# Altium PCB Priz.PcbDoc
Units mm, origin at the board's own origin, x right, y up, seen from the top; angles counter-clockwise.
Board outline 50.24 x 50.24 mm, 2 copper layers (Top Layer, Bottom Layer); 25 components, 41 nets, 106 pads, 20 vias.
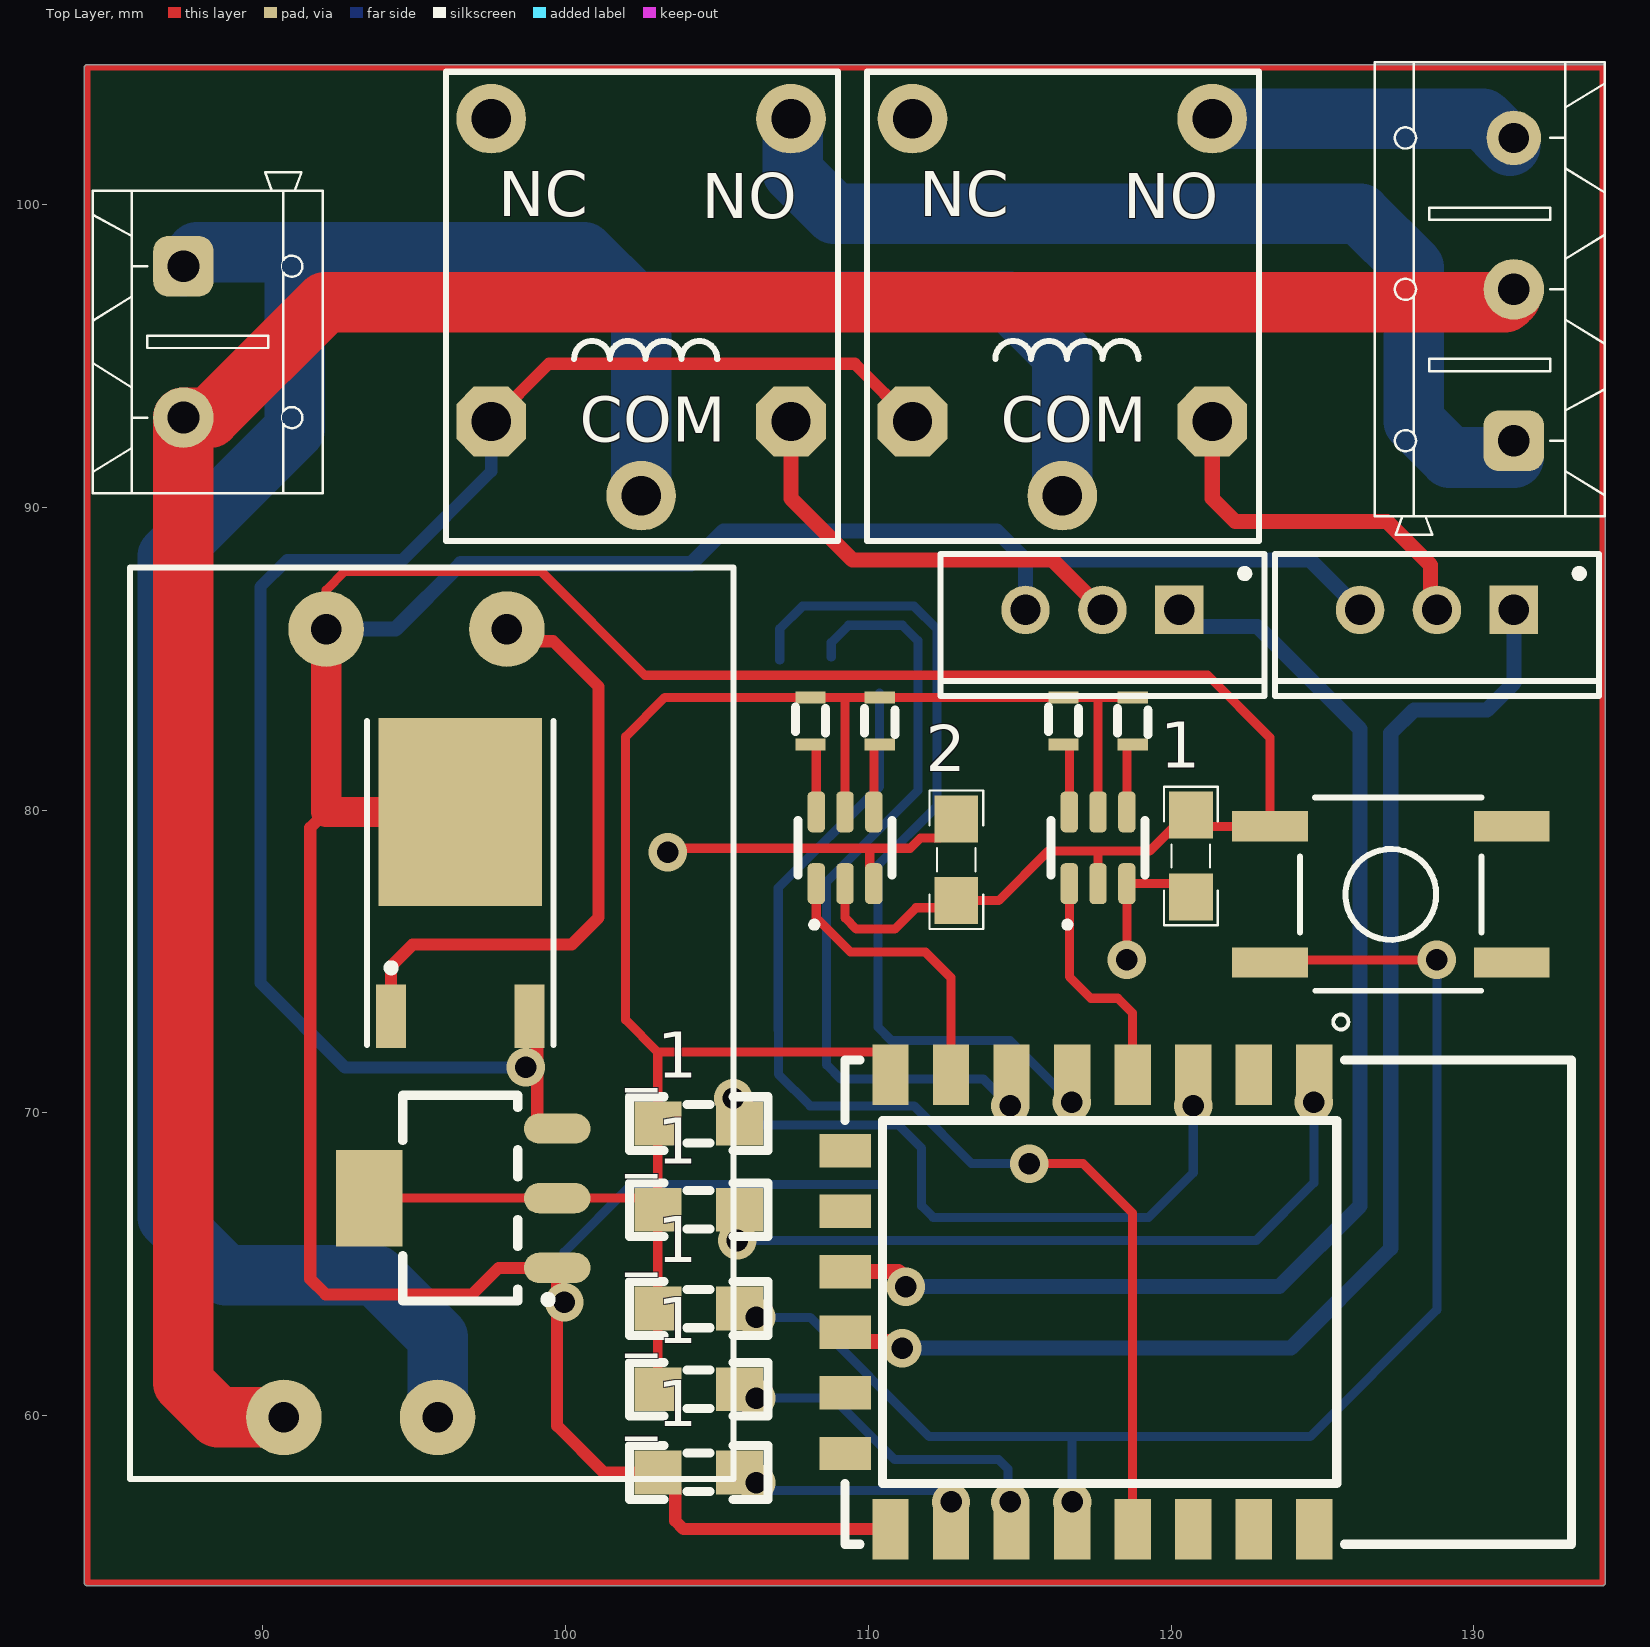
[diagram p0: Top Layer view]
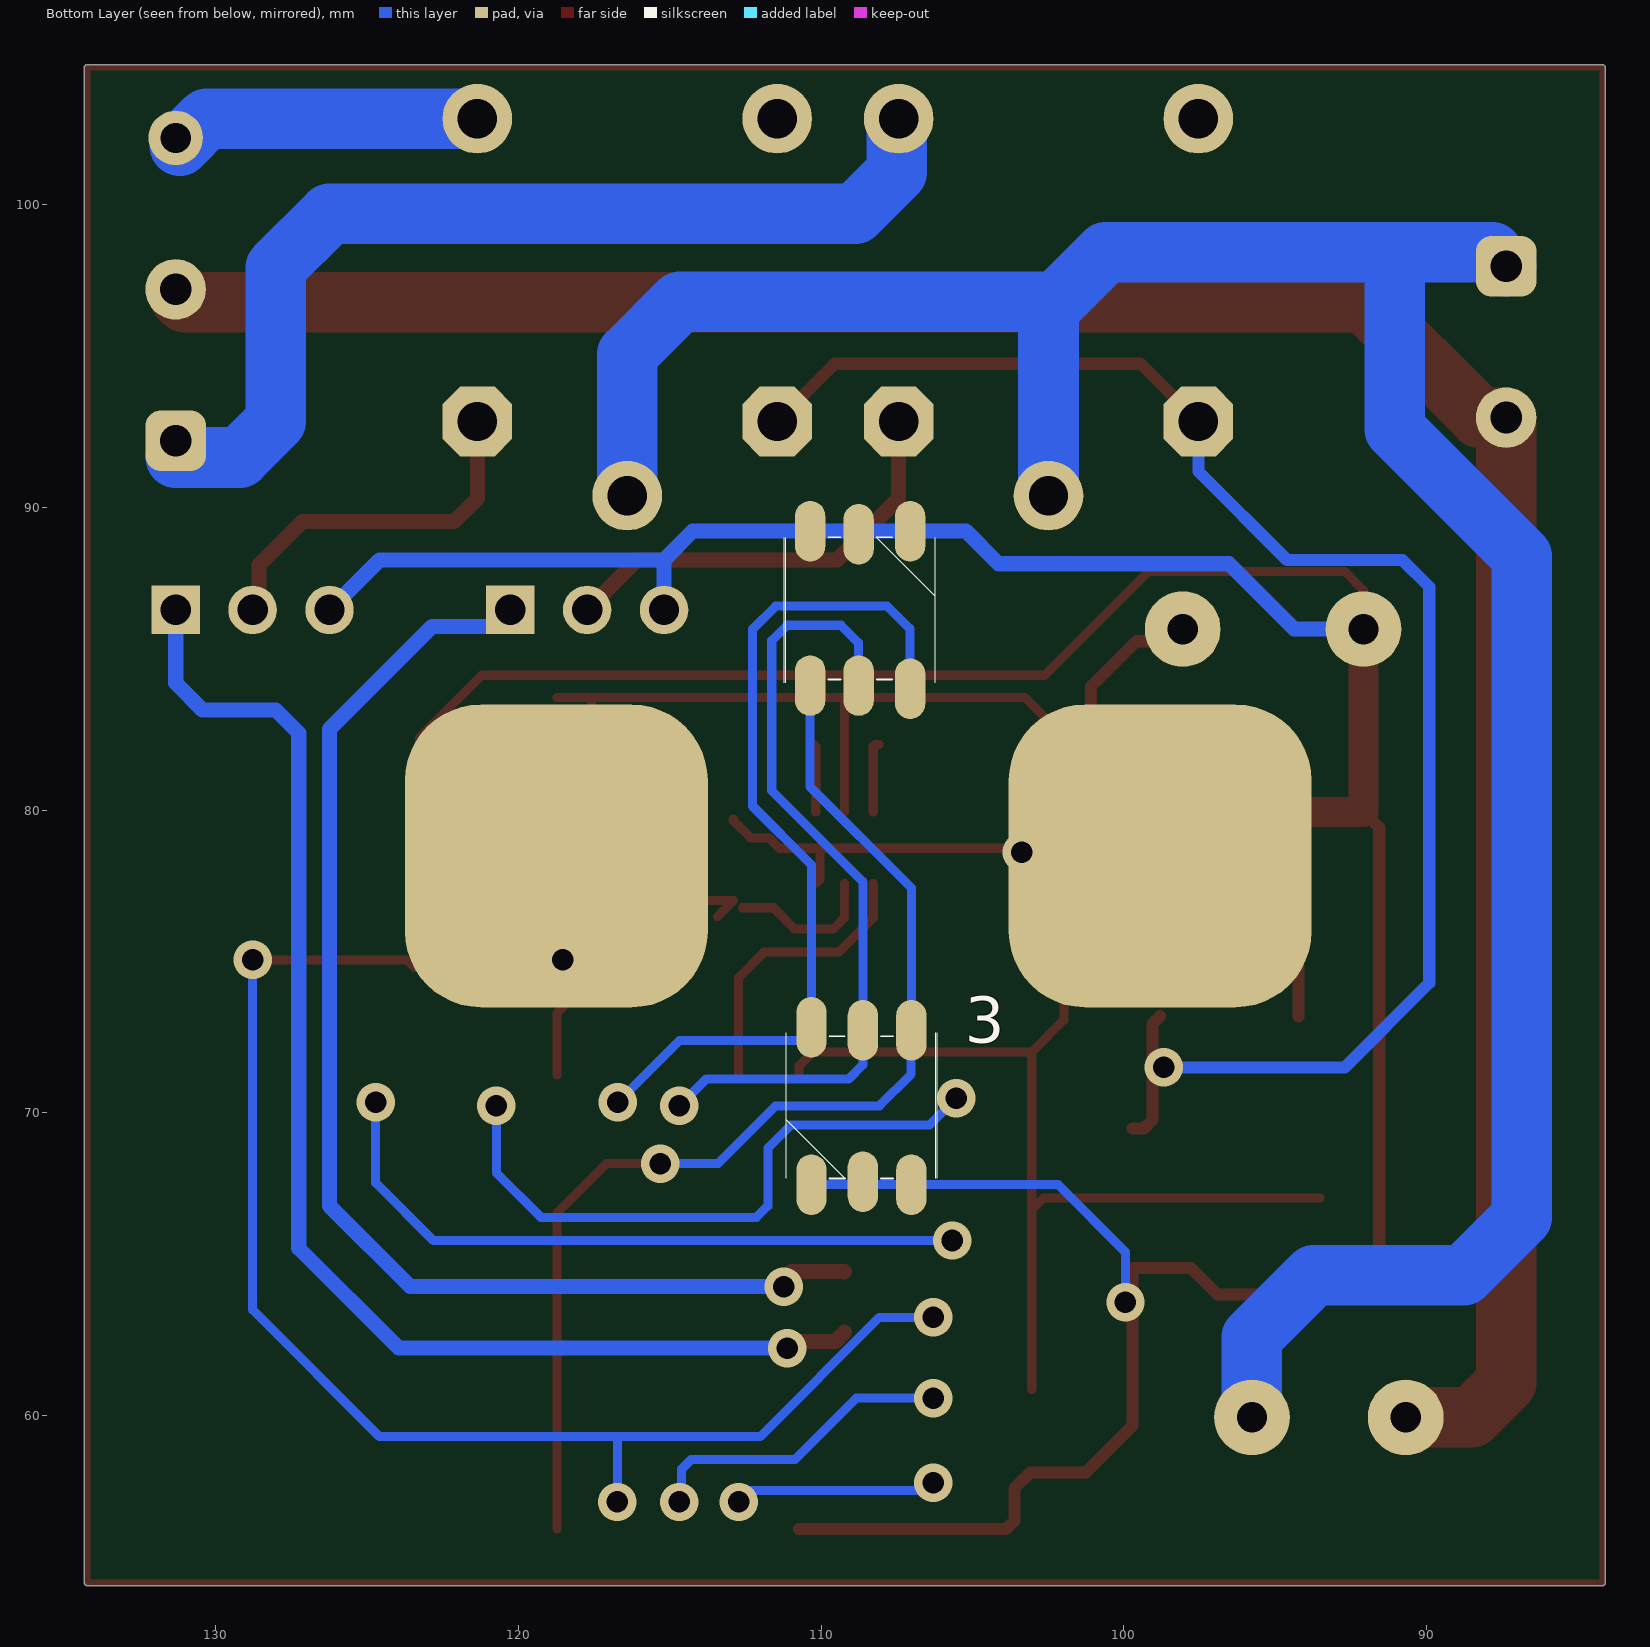
[diagram p1: Bottom Layer view, seen from below]
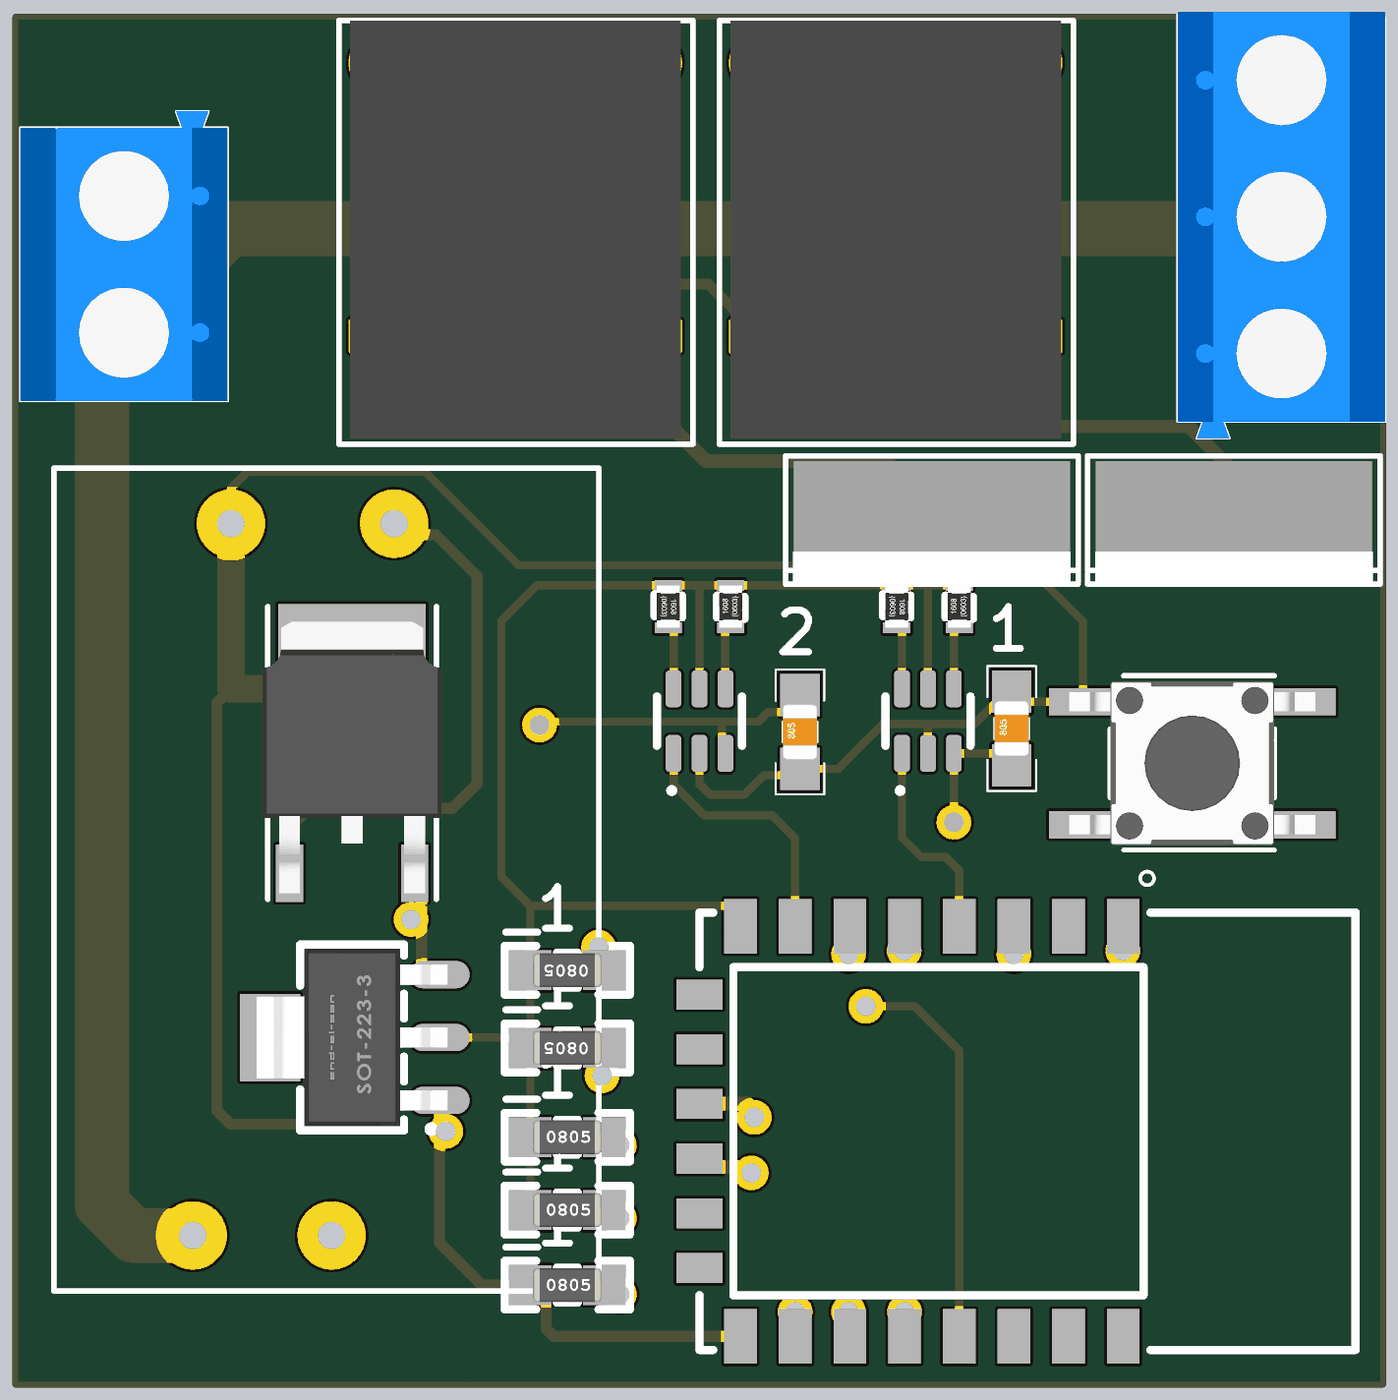
[diagram p2: 3D render of the assembled board from above, using the file's embedded part models]

## Layer stack, top to bottom
Top Solder: solder mask 0.0102, Solder Resist, Dk 3.5
Top Layer: signal copper 0.0356
Dielectric 1: dielectric 0.32, FR-4, Dk 4.8
Bottom Layer: signal copper 0.0356
Bottom Solder: solder mask 0.0102, Solder Resist, Dk 3.5

## Board outline
84.101,54.483 ccw(c84.201,54.483) 84.201,54.383 134.239,54.383 ccw(c134.239,54.483) 134.339,54.483 134.339,104.521 ccw(c134.239,104.521) 134.239,104.621 84.201,104.621 ccw(c84.201,104.521) 84.101,104.521

## Design rules (kind name [scope] priority, off if disabled: settings)
Clearance [All] p1: gap=0.254 ignorepadtopadclearanceinfootprint=FALSE except(0: Arc-Hole Track-Hole SMDPad-Hole THPad-Hole Via-Hole Fill-Hole Poly-Hole Region-Hole Text-Hole)
PolygonConnect [All] p1: connectstyle=Relief reliefconductorwidth=0.254 reliefentries=4 polygonreliefangle="90 Angle" airgapwidth=0.254
RoutingVias [All] p1: holewidth=0.711 width=1.27 viastyle="Through Hole" minholewidth=0.711 minwidth=1.27 maxholewidth=0.711 maxwidth=1.27
SolderMaskExpansion [All] p1: expansion=0.102
Width [All] p1: maxlimit=10 minlimit=0.1 preferedwidth=0.3
30 further rules are at their usual default settings.

## Components (designator, comment, footprint, x,y, rotation, side; value= is the part's Value field where it differs from the comment)
1 "Comment" CAPC3413X12N 120.65,78.486 r90 top
2 "Comment" CAPC3413X12N 112.903,78.359 r90 top
3 "Comment" "5050 LED package" 108.672,70.231 r270 bottom
_1 "Comment" RESC3413X04N 104.394,66.802 r180 top
_1 "Comment" RESC3413X04N 104.394,69.644 r180 top
_1 "Comment" RESC3413X04N 104.394,58.126 r0 top
_1 "Comment" RESC3413X04N 104.394,60.872 r0 top
_1 "Comment" RESC3413X04N 104.394,63.539 r0 top
U1 "ESP8266-12E/ESP-12E" XCVR_ESP8266-12E/ESP-12E 117.729,63.754 r270 top
? "Comment" "KF301 3PIN" 131.318,97.202 r90 top
? "Comment" "TO-220 AB" 117.729,86.614 r180 top
? "Comment" "TO-220 AB" 128.778,86.614 r180 top
? "Comment" "5050 LED package" 108.712,86.614 r90 bottom
? "Comment" "KF301 2PIN" 87.376,95.464 r270 top
? "Comment" TO-252 96.521,76.567 r0 top
? "Comment" "Relay 15.40x12.10x13.10" 102.492,90.387 r0 top
? "Comment" "Relay 15.40x12.10x13.10" 116.405,90.387 r0 top
? "Comment" SOT223 96.52,67.183 r180 top
? "Comment" SW-PB 127.254,77.216 r180 top
? "Comment" SOT95P285X126-6N 109.229,78.757 r90 top
? "Comment" MY_RES_SMD_0603 110.372,82.948 r90 top
? "Comment" MY_RES_SMD_0603 108.086,82.948 r270 top
? "Comment" SOT95P285X126-6N 117.586,78.757 r90 top
? "Comment" MY_RES_SMD_0603 118.729,82.948 r90 top
? "Comment" MY_RES_SMD_0603 116.443,82.948 r270 top

## Footprints (in the part's own frame and the unit in brackets; to place one, negate y for a bottom-side part, rotate by r counter-clockwise, add the part's x,y. Pads: shape width x height; smd on the part's side, far side on the other; paste and mask are expansions set on the pad)
"5050 LED package" [mm] "DESIGNER ABBAS BASEREH"
  oval 2x1 smd: 1(2.6,-1.65) 2(2.5,0.05) 3(2.6,1.65) 4(-2.5,1.65) 5(-2.5,0.05) 6(-2.6,-1.65)
  silkscreen extent -2.41,-2.49 2.4,2.51, body extent -2.75,-2.5 2.75,2.5, height 1.55
CAPC3413X12N [mm] "Chip Capacitor, 2-Leads, Body 3/40x1/30mm, IPC Medium Density-Design:Abbas Basereh"
  rect 1.55x1.45 smd: 1(-1.35,0) 2(1.35,0)
  silkscreen extent -2.29,-0.89 2.29,0.89, body extent -1,-0.62 1,0.63, height 0.78
"KF301 2PIN" [mm] "Designer Abbas Basereh"
  rrect50% 2x2 hole 1.05: 1(-2.5,0)
  round 2 hole 1.05: 2(2.5,0)
  silkscreen extent -5.6,-3 5,4.6, body extent -5.6,-3 5,4.6, height 10
"KF301 3PIN" [mm] "Designer Abbas Basereh"
  rrect50% 2x2 hole 1.05: 1(-5,0)
  round 2 hole 1.05: 2(0,0)
  round 1.8 hole 1: 3(5,0)
  silkscreen extent -8.1,-3 7.5,4.6, body extent -8.1,-3 7.5,4.6, height 10
MY_RES_SMD_0603 [mm]
  rect 0.4x1 smd: 1(-0.775,0) 2(0.775,0)
  silkscreen extent -0.45,-0.5 0.4,0.5, body extent -0.78,-0.43 0.78,0.43, height 0.45
"Relay 15.40x12.10x13.10" [mm]
  round 2.3 hole 1.3: 1(0,0) 2(-4.95,12.45) 3(4.95,12.45)
  oct 2.3x2.3 hole 1.3: 4(-4.95,2.45) 5(4.95,2.45)
  silkscreen extent -6.45,-1.5 6.5,14, body extent -6.05,-1.3 6.05,14, height 15.6
RESC3413X04N [mm] "Chip Resistor, 2-Leads, Body 3/40x1/30mm, IPC Medium Density-Design:Abbas Basereh"
  rect 1.55x1.45 smd: 1(-1.35,0) 2(1.35,0)
  silkscreen extent -2.29,-0.89 2.29,0.89, body extent -1.25,-0.62 1.25,0.62, height 0.79
SOT95P285X126-6N [mm]
  rrect50% 1.35x0.57 smd: 1(-1.185,0.95) 2(-1.185,0) 3(-1.185,-0.95) 4(1.185,-0.95) 5(1.185,0) 6(1.185,0.95)
  silkscreen extent -2.64,-1.56 0.9,1.56
SOT223 [mm] "SOT223, 4-Leads, Body 6.5x3.5mm, Pitch 2.30mm-Designer Abbas Basereh"
  oval 2.2x1 smd: 1(-3.2,2.3) 2(-3.2,0) 3(-3.2,-2.3)
  rect 2.2x3.2 smd: 4(3,0)
  Top Layer pour cut-out: -1.7,3.556 1.7,3.556 1.7,-3.556 -1.7,-3.556
  silkscreen extent -3.03,-3.4 1.9,3.47, body extent -3.5,-3.25 3.5,3.25, height 1.7
SW-PB [mm]
  rect 2.5x1 smd: 1(-3.992,2.25) 1(3.992,2.25) 2(-3.992,-2.25) 2(3.992,-2.25)
  silkscreen extent -3,-3.2 3,3.18, body extent -4.5,-3 4.5,3, height 5
"TO-220 AB" [mm] "Epoxy meets UL94, V0-Design:Abbas Basereh"
  rect 1.6x1.6 hole 1: 1(-2.54,0)
  round 1.6 hole 1: 2(0,0) 3(2.54,0)
  silkscreen extent -5.35,-1.85 5.35,2.85, body extent -5.08,-1.65 5.08,2.92, height 18.54
TO-252 [mm] "D-PAK/TO-252-AA; 3 Leads (1 Cropped); Body 10.1 (inc. leads) x 6.6 mm (LxW max)"
  rect 1x2.1 smd: 1(-2.285,-3.375) 3(2.285,-3.375)
  rect 5.4x6.2 smd: 4(0,3.375)
  silkscreen extent -3.08,-4.32 3.09,6.38, body extent -3.27,-4.11 3.27,5.83, height 2.39
XCVR_ESP8266-12E/ESP-12E [mm]
  rect 2x1.2 smd: 1(-7.5,7) 2(-7.5,5) 3(-7.5,3) 4(-7.5,1) 5(-7.5,-1) 6(-7.5,-3) 7(-7.5,-5) 8(-7.5,-7) 15(7.5,-7) 16(7.5,-5) 17(7.5,-3) 18(7.5,-1) 19(7.5,1) 20(7.5,3) 21(7.5,5) 22(7.5,7)
  rect 1.1x1.7 smd: 9(-5,-8.5) 10(-3,-8.5) 11(-1,-8.5) 12(1,-8.5) 13(3,-8.5) 14(5,-8.5)
  silkscreen extent -9.5,-8.5 8,15.5

## Part data
U1: Package=None, Availability=Unavailable, MP=ESP8266-12E/ESP-12E, Price=None

## Free pads (board coordinates)
  rrect50% 10x10 smd far side: 3(98.806,78.486) 3(118.745,78.486)
  round 2.5 hole 1: 8(90.693,59.944) 8(92.09,85.979) 8(95.773,59.944) 8(98.059,85.979)

## Via types
v1: diameter 1.27, hole 0.711, Top Layer to Bottom Layer, 20 vias

## Nets (pads, with @x,y where several pads share a name; then routed paths per layer and width w, separated by ;. In a path a pad name is that pad's centre, name@x,y a point inside that pad or via, vN(x,y) a via of type N, cw(c..) or ccw(c..) an arc to the next point about the centre after c; other vN are vias at no path point)
4v: 
5v: ?.3@98.806,73.192 ?.3@99.72,69.483 ?.4@97.542,92.837 ?.4@111.455,92.837 | length 53.7
  Top Layer w0.4: ?.4@97.542,92.837 99.447,94.742 109.55,94.742 ?.4@111.455,92.837 ; ?.3@98.806,73.192 99.063,72.935 99.063,69.76 99.34,69.483 ?.3@99.72,69.483
  Bottom Layer w0.4: ?.4@97.542,92.837 97.542,91.192 94.615,88.265 90.805,88.265 89.916,87.376 89.916,74.295 92.71,71.501 v1(98.679,71.501)
12v: ?.1@94.236,73.192 pad.8@98.059,85.979 | length 20.6
  Top Layer w0.4: ?.1@94.236,73.192 94.236,74.854 94.947,75.565 100.203,75.565 101.092,76.454 101.092,84.074 99.589,85.577 98.461,85.577 pad.8@98.059,85.979
AHLB1: ?.1@110.372,82.173 ?.4@110.179,79.942 | length 2.4
  Top Layer w0.3: ?.4@110.179,79.942 110.179,82.1 110.252,82.173 ?.1@110.372,82.173
AHLB2: ?.1@118.729,82.173 ?.4@118.536,79.942 | length 2.4
  Top Layer w0.3: ?.4@118.536,79.942 118.536,82.1 118.609,82.173 ?.1@118.729,82.173
AHLB3: 
AHLB4: 
B: 3.4 ?.4@110.362,84.114 U1.19 | length 38
  Top Layer w0.3: v1(115.316,68.326) 117.094,68.326 118.729,66.691 U1.19
  Bottom Layer w0.3: ?.4@110.372,83.86 110.372,80.781 107.022,77.431 3.4 107.027,72.726 107.027,71.281 108.077,70.231 111.506,70.231 113.411,68.326 v1(115.316,68.326)
CH1: ?.3@121.355,102.837 ?.3@131.318,102.202 | length 10.2
  Bottom Layer w2: ?.3@121.355,102.837 130.295,102.837 ?.3@131.191,101.941
CH2: ?.1@131.318,92.202 ?.3@107.442,102.837 | length 32.5
  Bottom Layer w2: ?.3@107.442,102.837 107.499,102.78 107.499,101.072 108.876,99.695 126.238,99.695 128.016,97.917 128.016,92.837 129.206,91.647 ?.1@131.318,91.647
EN: _1.1@105.744,69.644 U1.3 | length 20.8
  Bottom Layer w0.3: v1(105.537,70.485) 106.426,69.596 110.998,69.596 111.76,68.834 111.76,66.929 112.141,66.548 119.253,66.548 120.729,68.024 v1(120.729,70.231)
FASE: ?.1@87.376,97.964 ?.1@102.492,90.387 ?.1@116.405,90.387 pad.8@95.773,59.944 | length 88.6
  Bottom Layer w2: ?.1@87.376,97.964 87.837,98.425 91.059,98.425 ; pad.8@95.773,59.944 95.773,62.596 93.726,64.643 88.773,64.643 86.868,66.548 86.868,88.392 91.059,92.583 91.059,97.964 91.059,98.425 ; ?.1@102.492,90.387 102.492,96.535 102.235,96.792 ; ?.1@116.405,90.387 116.405,95.05 114.663,96.792 102.235,96.792 ; 91.059,98.425 100.602,98.425 102.235,96.792
FLASH: ?.1@123.262,74.966 _1.2@105.744,63.539 U1.18 | length 45.3
  Top Layer w0.3: ?.1@123.262,74.966 123.424,74.803 123.678,75.057 v1(128.778,75.057)
  Bottom Layer w0.3: v1(106.299,63.246) 108.077,63.246 112.014,59.309 116.729,59.309 ; v1(116.729,57.15) 116.729,59.309 ; v1(128.778,75.057) 128.778,63.5 124.587,59.309 116.729,59.309
G: 3.5 ?.5@108.762,84.114 U1.6 | length 25.7
  Bottom Layer w0.3: ?.5@108.772,85.063 108.772,85.531 109.347,86.106 111.125,86.106 111.633,85.598 111.633,80.645 108.622,77.634 3.5 108.622,71.591 109.093,71.12 113.792,71.12 v1(114.681,70.231)
GND: 1.2 2.1 3.1 3.2 3.3 ?.1@99.72,64.883 ?.1@107.062,89.214 ?.2@108.762,89.114 ?.2@109.229,77.572 ?.2@117.586,77.572 ?.2@123.262,79.466 ?.3@110.362,89.214 ?.3@115.189,86.614 ?.3@126.238,86.614 ?.4@96.521,79.942 _1.1@103.044,58.126 pad.8@92.09,85.979 U1.15 | length 160.6
  Top Layer w0.3: pad.8@92.09,85.979 92.09,87.264 92.71,87.884 99.187,87.884 102.616,84.455 121.205,84.455 123.262,82.398 123.262,79.466 121.201,79.466 120.911,79.756 120.396,79.756 119.291,78.651 117.586,78.651 ; ?.2@109.229,77.572 109.229,76.447 109.603,76.073 110.871,76.073 111.575,76.777 2.1@112.598,76.777 ; 2.1@113.42,76.492 2.1 114.3,77.009 115.942,78.651 117.586,78.651 ; ?.2@117.586,77.572 117.586,78.651
  Top Layer w0.4: 92.09,79.942 91.567,79.419 91.567,64.516 92.075,64.008 96.915,64.008 97.79,64.883 99.72,64.883 99.72,59.665 101.259,58.126 103.044,58.126 103.094,58.126 103.619,57.601 103.619,56.528 103.893,56.254 U1.15
  Top Layer w1: pad.8@92.09,85.979 92.09,79.942 ?.4@96.521,79.942
  Bottom Layer w0.3: v1(99.949,63.754) 99.949,65.405 102.175,67.631 3.3 3.1
  Bottom Layer w0.5: pad.8@92.09,85.979 94.376,85.979 96.535,88.138 104.14,88.138 105.216,89.214 107.062,89.214 110.362,89.214 114.24,89.214 115.189,88.265 ; ?.3@115.189,86.614 115.189,88.265 ; ?.3@126.238,86.614 124.587,88.265 115.189,88.265
NOLL: ?.2@87.376,92.964 ?.2@131.318,97.202 pad.8@90.693,59.944 | length 81.1
  Top Layer w2: pad.8@90.693,59.944 88.519,59.944 87.376,61.087 87.376,92.964 88.247,92.964 92.057,96.774 126.873,96.774 131.024,96.774 ?.2@131.191,96.941
OUT1: ?.1@108.279,77.572 U1.7 | length 9.6
  Top Layer w0.3: ?.1@108.279,77.572 108.279,76.447 109.415,75.311 111.887,75.311 112.729,74.469 U1.7
OUT2: ?.1@116.636,77.572 U1.4 | length 7.7
  Top Layer w0.3: ?.1@116.636,77.572 116.636,74.499 117.348,73.787 118.237,73.787 118.729,73.295 U1.4
OUT3: _1.2@105.744,58.126 U1.16 | length 6.7
  Bottom Layer w0.3: v1(106.299,57.785) 106.553,57.531 112.348,57.531 v1(112.729,57.15)
OUT4: 
OUT5: 
POWER: 
R: 3.6 ?.6@107.062,84.014 U1.5 | length 28.2
  Bottom Layer w0.3: ?.6@107.072,84.963 107.072,85.99 107.823,86.741 111.506,86.741 112.268,85.979 112.268,80.137 110.322,78.191 3.6 110.763,72.39 114.681,72.39 v1(116.713,70.358)
REL1: ?.2@117.729,86.614 ?.5@107.442,92.837 | length 14.4
  Top Layer w0.5: ?.5@107.442,92.837 107.442,90.297 109.474,88.265 116.078,88.265 ?.2@117.729,86.614
REL2: ?.2@128.778,86.614 ?.5@121.355,92.837 | length 12.2
  Top Layer w0.5: ?.5@121.355,92.837 121.355,90.297 122.117,89.535 127.127,89.535 128.568,88.094 128.568,86.824 ?.2@128.778,86.614
RES1: 
RES2: _1.2@105.744,60.872 U1.17 | length 10.4
  Bottom Layer w0.3: v1(106.299,60.579) 108.839,60.579 110.871,58.547 114.3,58.547 114.612,58.235 114.612,57.219 v1(114.681,57.15)
RES3: 
RST: _1.1@105.744,66.802 U1.1 | length 22.5
  Bottom Layer w0.3: v1(105.664,65.786) 122.809,65.786 124.714,67.691 v1(124.714,70.358)
T1: 2.2 ?.3@110.179,77.572 pad.3@98.806,78.486 | length 11.2
  Top Layer w0.3: v1(103.378,78.613) 103.505,78.74 110.044,78.74 ; ?.3@110.179,77.572 110.044,77.707 110.044,78.74 ; 2.2 112.903,79.659 112.328,79.084 111.723,79.084 111.379,78.74 110.044,78.74
T2: 1.1 ?.3@118.536,77.572 pad.3@118.745,78.486 | length 4.8
  Top Layer w0.3: v1(118.536,75.057) 118.536,77.572 120.214,77.572 1.1
T3: 
T4: 
TOG1: ?.2@108.086,82.173 ?.6@108.279,79.942 | length 2.4
  Top Layer w0.3: ?.2@108.086,82.173 108.206,82.173 108.279,82.1 ?.6@108.279,79.942
TOG2: ?.2@116.443,82.173 ?.6@116.636,79.942 | length 2.4
  Top Layer w0.3: ?.2@116.443,82.173 116.563,82.173 116.636,82.1 ?.6@116.636,79.942
TOG3: 
TOG4: 
TR1: ?.1@120.269,86.614 U1.11 | length 41.8
  Top Layer w0.5: U1.11 109.237,64.762 110.99,64.762 111.236,64.516 v1(111.236,64.262)
  Bottom Layer w0.5: v1(111.236,64.262) 123.571,64.262 126.238,66.929 126.238,82.677 122.851,86.064 120.819,86.064 ?.1@120.269,86.614
TR2: ?.1@131.318,86.614 U1.12 | length 43.8
  Top Layer w0.5: U1.12 109.529,62.454 110.693,62.454 110.917,62.23 v1(111.125,62.23)
  Bottom Layer w0.5: v1(111.125,62.23) 123.952,62.23 127.254,65.532 127.254,82.55 128.016,83.312 130.429,83.312 131.318,84.201 ?.1@131.318,86.614
VCC: ?.1@108.086,83.723 ?.1@116.443,83.723 ?.2@99.72,67.183 ?.2@110.372,83.723 ?.2@118.729,83.723 ?.4@93.52,67.183 ?.5@109.229,79.942 ?.5@117.586,79.942 _1.1@103.044,60.872 _1.1@103.044,63.539 _1.2@103.044,66.802 _1.2@103.044,69.644 U1.8 | length 64.7
  Top Layer w0.3: ?.4@93.52,67.183 99.72,67.183 102.663,67.183 _1.2@103.044,66.802 ; _1.1@103.044,60.872 103.044,63.539 _1.2@103.044,66.802 ; ?.5@109.229,79.942 109.229,83.723 ; U1.8 110.729,71.559 110.279,72.009 103.044,72.009 ; ?.5@117.586,79.942 117.586,83.723 ; ?.2@118.729,83.723 117.586,83.723 ; _1.2@103.044,66.802 103.044,69.644 103.044,72.009 ; 103.044,72.009 101.981,73.072 101.981,82.423 103.281,83.723 108.086,83.723 109.229,83.723 ; 109.229,83.723 110.372,83.723 117.586,83.723
VIN: 
pads on no net: ?.1@131.246,74.966 ?.2@97.542,102.837 ?.2@111.455,102.837 ?.2@131.246,79.466 U1.2 U1.9 U1.10 U1.13 U1.14 U1.20 U1.21 U1.22
copper on no net: | length 200.2
  Top Layer w0.2: 84.201,54.483 134.239,54.483 134.239,104.521 84.201,104.521 84.201,54.483

## Silkscreen, mask and mechanical layers (free items; w line width, h text height)
Top Overlay:
  lines w0.2: 85.613,57.912 85.613,88.011 105.552,88.011 105.552,57.912 85.613,57.912

## Text inside footprints (layer, text, board x,y; h text height)
?: Top Overlay "NC" at 97.768,99.607 h1.5; Top Overlay "NO" at 104.499,99.556 h1.5; Top Overlay "COM" at 100.46,92.165 h1.5
?: Top Overlay "NC" at 111.681,99.607 h1.5; Top Overlay "NO" at 118.412,99.556 h1.5; Top Overlay "COM" at 114.373,92.165 h1.5